# EAGLE board SYSTEM MINIMUM ATMEGA16 L298 LCD FIX (EAGLE 5.04)
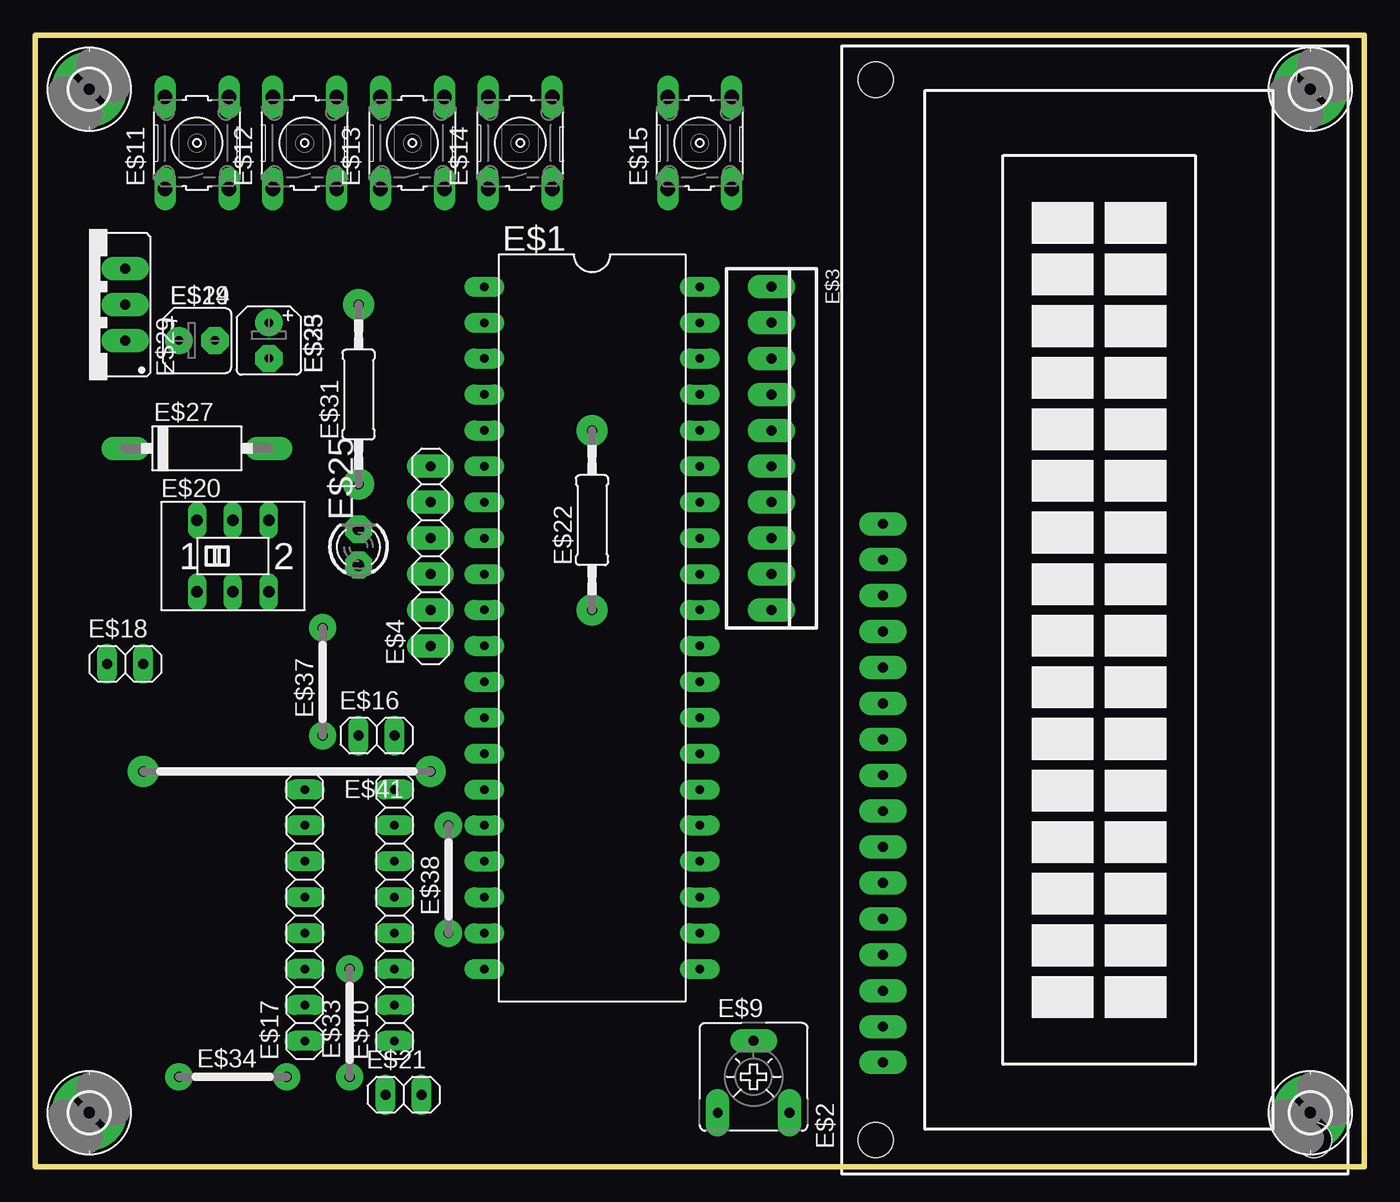
[diagram p0: board, top side]
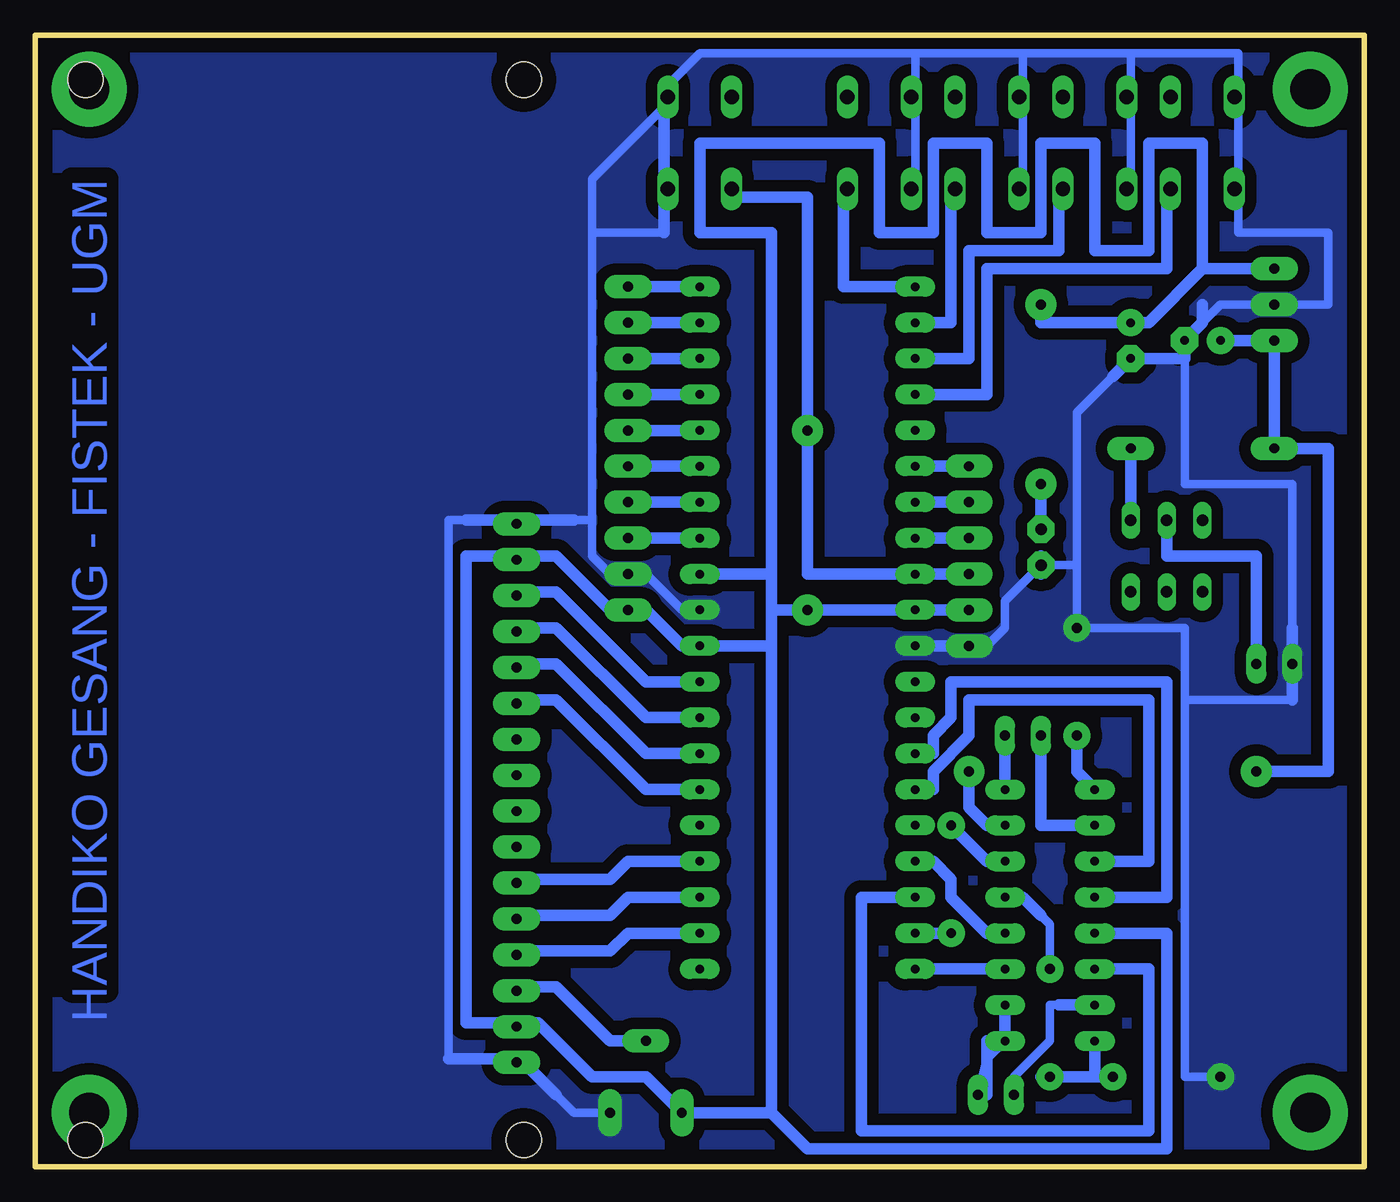
[diagram p1: board, bottom side, seen from below]

Size 93.98 x 80.01 mm. Coordinates in mm from the lower left corner, seen from the top.
Outline: 0,0 93.98,0 93.98,80.01 0,80.01 0,0
Copper layers (1*16): Top 0.035mm / dielectric 1.5mm / Bottom 0.035mm
Design rules "default": minimum track width 10mil, minimum drill 24mil, track to track 8mil, track to pad 8mil, pad to pad 8mil, via to via 8mil, smd to smd 8mil, copper to edge 40mil, drill to drill 8mil, minimum pad ring 10mil, minimum via ring 8mil, stop-mask expansion 4mil, vias tented up to drill 0mil, thermal gap 10mil

## Footprints (pad centres in the part's own frame; a part is rotated, then mirrored left to right if it is on the bottom)
DIL40 = drill 0.6 pad 1.422 long: 1 -24.13,-7.62; 2 -21.59,-7.62; 3 -19.05,-7.62; 4 -16.51,-7.62; 5 -13.97,-7.62; 6 -11.43,-7.62; 7 -8.89,-7.62; 8 -6.35,-7.62; 9 -3.81,-7.62; 10 -1.27,-7.62; 11 1.27,-7.62; 12 3.81,-7.62; 13 6.35,-7.62; 14 8.89,-7.62; 15 11.43,-7.62; 16 13.97,-7.62; 17 16.51,-7.62; 18 19.05,-7.62; 19 21.59,-7.62; 20 24.13,-7.62; 21 24.13,7.62; 22 21.59,7.62; 23 19.05,7.62; 24 16.51,7.62; 25 13.97,7.62; 26 11.43,7.62; 27 8.89,7.62; 28 6.35,7.62; 29 3.81,7.62; 30 1.27,7.62; 31 -1.27,7.62; 32 -3.81,7.62; 33 -6.35,7.62; 34 -8.89,7.62; 35 -11.43,7.62; 36 -13.97,7.62; 37 -16.51,7.62; 38 -19.05,7.62; 39 -21.59,7.62; 40 -24.13,7.62
TUXGR_16X2_R2 = drill 0.7 pad 1.676 long: 1 -32.01,14.99; 2 -29.47,14.99; 3 -26.93,14.99; 4 -24.39,14.99; 5 -21.85,14.99; 6 -19.31,14.99; 7 -16.77,14.99; 8 -14.23,14.99; 9 -11.69,14.99; 10 -9.15,14.99; 11 -6.61,14.99; 12 -4.07,14.99; 13 -1.53,14.99; 14 1.01,14.99; 15 3.55,14.99; 16 6.09,14.99 | hole 2.5: -37.5,-15.5; 37.5,-15.5; -37.5,15.5; 37.5,15.5
22-23-2101 = drill 0.7 pad 1.676 long: 1 -11.43,0; 2 -8.89,0; 3 -6.35,0; 4 -3.81,0; 5 -1.27,0; 6 1.27,0; 7 3.81,0; 8 6.35,0; 9 8.89,0; 10 11.43,0
1X06 = drill 0.7 pad 1.676 long: 1 -6.35,0; 2 -3.81,0; 3 -1.27,0; 4 1.27,0; 5 3.81,0; 6 6.35,0
2,8-PAD = drill 2.8 pad 5.334 round: B2,8 0,0
CA6V = drill 0.7 pad 1.676 long: A -2.54,-2.54; E 2.54,-2.54; S 0,2.54
1X08 = drill 0.6 pad 1.422 long: 1 -8.89,0; 2 -6.35,0; 3 -3.81,0; 4 -1.27,0; 5 1.27,0; 6 3.81,0; 7 6.35,0; 8 8.89,0
B3F-10XX = drill 1.016 long: 1 -3.251,2.261; 2 3.251,2.261; 3 -3.251,-2.261; 4 3.251,-2.261
1X02 = drill 0.7 pad 1.422 long: 1 -1.27,0; 2 1.27,0
B45181A = drill 0.6 pad 1.93 round: + -1.27,0 | drill 0.6 pad 1.93 octagon: - 1.27,0
A68-A31 = drill 0.813 long: 1 -2.54,-2.54; 2 0,-2.54; 3 2.54,-2.54; 4 -2.54,2.54; 5 0,2.54; 6 2.54,2.54
0207/12 = drill 0.7 pad 2.184 round: 1 -6.35,0; 2 6.35,0
LED3MM = drill 0.813 pad 1.93 octagon: A 1.27,0; K -1.27,0
P1-10 = drill 0.7 pad 1.676 long: A 5.08,0; C -5.08,0
78XXS = drill 0.7 pad 1.676 long: GND 0,-2.54; IN -2.54,-2.54; OUT 2.54,-2.54
07 = drill 0.7 pad 1.93 round: 1 -3.81,0; 2 3.81,0
20 = drill 0.7 pad 2.184 round: 1 -10.16,0; 2 10.16,0

## Placement (x,y rotation side)
E$1  [DIL40]  39.37,38.1 270 top
E$2  [TUXGR_16X2_R2]  74.93,39.37 90 top
E$3  [22-23-2101]  52.07,50.8 270 top
E$4  [1X06]  27.94,43.18 90 top
E$5  [2,8-PAD]  3.81,3.81 0 top
E$6  [2,8-PAD]  90.17,3.81 0 top
E$7  [2,8-PAD]  90.17,76.2 0 top
E$8  [2,8-PAD]  3.81,76.2 0 top
E$9  [CA6V]  50.8,6.35 0 top
E$10  [1X08]  25.4,17.78 90 top
E$11  [B3F-10XX]  11.43,72.39 90 top
E$12  [B3F-10XX]  19.05,72.39 90 top
E$13  [B3F-10XX]  26.67,72.39 90 top
E$14  [B3F-10XX]  34.29,72.39 90 top
E$15  [B3F-10XX]  46.99,72.39 90 top
E$16  [1X02]  24.13,30.48 0 top
E$17  [1X08]  19.05,17.78 90 top
E$18  [1X02]  6.35,35.56 0 top
E$19  [B45181A]  11.43,58.42 0 top
E$20  [A68-A31]  13.97,43.18 0 top
E$21  [1X02]  26.03,5.08 0 top
E$22  [0207/12]  39.37,45.72 90 top
E$23  [B45181A]  16.51,58.42 270 top
E$24  [B45181A]  11.43,58.42 0 top
E$25  [LED3MM]  22.86,43.81 90 top
E$27  [P1-10]  11.43,50.8 0 top
E$29  [78XXS]  3.81,60.96 90 top
E$31  [0207/12]  22.86,54.61 90 top
E$33  [07]  22.22,10.16 90 top
E$34  [07]  13.97,6.35 0 top
E$35  [B45181A]  16.51,58.42 270 top
E$37  [07]  20.32,34.29 90 top
E$38  [07]  29.21,20.32 90 top
E$41  [20]  17.78,27.94 180 top

## Library data of the parts
E$1 = atmel
E$2 = display-lcd
E$3 = con-molex
E$4 E$10 E$16-E$18 E$21 = pinhead
E$5-E$8 = holes
E$9 = pot
E$11-E$15 = switch-omron
E$19 E$22-E$24 E$31 E$35 = resistor
E$20 = switch
E$25 = led
E$27 = diode
E$29 = v-reg
E$33 E$34 E$37 E$38 E$41 = jumper

## Nets
GND: E$1.11 E$1.31 E$3.9 E$4.1 E$9.E E$18.1 E$23.- E$24.- E$29.GND E$34.1 E$37.2
S$1: E$1.40 E$3.1
S$2: E$1.39 E$3.2
S$3: E$1.38
S$4: E$1.37 E$3.4
S$5: E$1.36 E$3.5
S$6: E$1.35 E$3.6
S$7: E$1.34 E$3.7
S$8: E$1.33 E$3.8
S$9: E$1.10 E$1.30 E$1.32 E$3.10 E$4.2 E$9.A E$22.1 E$23.+ E$29.OUT E$31.2
S$10: E$1.4
S$12: E$1.6 E$4.6
S$13: E$1.7 E$4.5
S$14: E$1.8 E$4.4
S$15: E$1.9 E$4.3 E$22.2
S$16: E$1.3
S$17: E$20.6 E$27.A
S$19: E$1.2
S$20: E$25.A E$31.1
S$21: E$9.S
S$22: E$1.1
S$26: E$1.22
S$28: E$1.23
S$29: E$24.+ E$27.C E$29.IN E$41.2
S$31: E$18.2 E$20.5
S$32: E$1.24
S$33: E$16.2
S$34: E$16.1
S$35: E$21.2
S$36: E$21.1
S$37: E$1.20
S$38: E$1.17
S$39: E$37.1
S$40: E$1.14
S$41: E$1.15
S$42: E$1.18
S$43: E$1.26
S$44: E$41.1
S$45: E$38.2
S$46: E$1.19 E$38.1
S$47: E$33.2
S$48: E$33.1 E$34.2
S$49: E$1.27
S$50: E$1.28
S$51: E$1.29

## Tracks (layer width: path | path; a pad name or v marks a point on that pad's centre or on a via)
GND
  Bottom 0.61: E$9.E 55.88,3.81 57.15,5.08 | E$1.31 48.26,39.37 50.8,41.91 E$3.9 53.34,41.91 54.61,43.18 54.61,45.72 | 64.77,7.62 64.77,45.72 63.5,45.72 | 54.61,45.72 55.88,45.72 | 54.61,66.04 54.61,69.85 49.53,74.93 | 54.61,66.04 54.61,45.72 | 49.53,71.12 49.53,68.58 | 49.53,71.12 49.53,66.04 54.61,66.04 | 49.53,74.93 49.53,71.12 | 49.53,74.93 49.53,76.2 46.99,78.74 31.75,78.74 | 31.75,78.74 31.75,68.58 | 24.13,76.2 24.13,74.93 | 24.13,76.2 24.13,68.58 | 24.13,78.74 24.13,76.2 | 24.13,78.74 31.75,78.74 | 16.51,76.2 16.51,73.66 | 16.51,76.2 16.51,68.58 | 16.51,78.74 16.51,76.2 | 16.51,78.74 24.13,78.74 | 16.51,78.74 8.89,78.74 8.89,66.04 2.54,66.04 2.54,60.96 E$29.GND | E$29.GND 5.08,60.96 | E$1.11 E$4.1 26.67,36.83 25.4,38.1 25.4,40.01 22.86,42.55 20.32,42.55 | E$29.GND 10.16,60.96 E$24.- | 12.7,57.15 12.7,48.26 5.08,48.26 5.08,38.1 | 17.78,55.88 20.32,53.34 20.32,42.55 | 20.32,42.55 E$37.2 12.7,38.1 12.7,33.02 | 12.7,33.02 5.08,33.02 | 12.7,33.02 12.7,6.35 E$34.1
  Bottom 0.813: 57.15,5.08 59.69,7.62 64.77,7.62 | 55.88,45.72 63.5,45.72 | 49.53,76.2 49.53,66.04 | 11.43,60.96 11.43,59.69 E$24.- 12.7,57.15 E$23.- 17.78,55.88 | 5.08,38.1 E$18.1 5.08,33.02 | E$4.1 E$1.11 E$4.1
  pour Bottom (isolate 0.813, no thermals): 0,80.01 93.98,80.01 93.98,0 0,0
S$1
  Bottom 0.61: E$1.40 E$3.1
  Bottom 0.813: E$1.40 E$3.1
S$2
  Bottom 0.61: E$1.39 E$3.2
  Bottom 0.813: E$1.39 E$3.2
S$3
  Bottom 0.61: E$1.38 52.07,57.15
  Bottom 0.813: E$1.38 53.34,57.15
S$4
  Bottom 0.61: E$1.37 E$3.4
  Bottom 0.813: E$1.37 E$3.4
S$5
  Bottom 0.61: E$1.36 E$3.5
  Bottom 0.813: E$1.36 E$3.5 E$1.36
S$6
  Bottom 0.61: E$1.35 E$3.6
  Bottom 0.813: E$1.35 E$3.6
S$7
  Bottom 0.61: E$1.34 E$3.7
  Bottom 0.813: E$1.34 E$3.7
S$8
  Bottom 0.61: E$1.33 E$3.8
  Bottom 0.813: E$1.33 E$3.8
S$9
  Bottom 0.61: E$1.10 E$4.2 E$1.10
  Bottom 0.813: 50.8,39.37 E$3.10 53.34,39.37 | 41.91,3.81 E$9.A 50.8,6.35 54.61,6.35 58.42,10.16 63.5,10.16 63.5,43.18 57.15,43.18 53.34,39.37 | 41.91,3.81 39.37,1.27 13.97,1.27 13.97,16.51 19.05,16.51 | 50.8,39.37 48.26,36.83 E$1.30 41.91,36.83 | 50.8,39.37 53.34,39.37 | 41.91,3.81 41.91,36.83 | 33.02,39.37 E$1.10 E$4.2 33.02,39.37 | 33.02,39.37 E$22.1 41.91,39.37 | 41.91,36.83 41.91,39.37 | 41.91,39.37 41.91,41.91 | 41.91,41.91 E$1.32 | 41.91,41.91 41.91,66.04 46.99,66.04 46.99,72.39 34.29,72.39 34.29,66.04 30.48,66.04 30.48,72.39 26.67,72.39 26.67,66.04 22.86,66.04 22.86,72.39 19.05,72.39 19.05,64.77 15.24,64.77 15.24,72.39 11.43,72.39 11.43,63.5 | 11.43,63.5 E$29.OUT | 11.43,63.5 15.24,59.69 E$23.+ 22.86,59.69 E$31.2
S$10
  Bottom 0.813: E$1.4 26.67,54.61 26.67,63.5 13.97,63.5 13.97,69.85
S$12
  Bottom 0.61: E$4.6 E$1.6
  Bottom 0.813: E$4.6 E$1.6
S$13
  Bottom 0.61: E$4.5 E$1.7
  Bottom 0.813: E$4.5 E$1.7
S$14
  Bottom 0.61: E$4.4 E$1.8
  Bottom 0.813: E$4.4 E$1.8
S$15
  Bottom 0.61: E$4.3 E$1.9
  Bottom 0.813: E$4.3 E$1.9 39.37,41.91 E$22.2 39.37,68.58 44.45,68.58
S$16
  Bottom 0.61: 21.59,68.58 21.59,69.85
  Bottom 0.813: 21.59,68.58 21.59,64.77 27.94,64.77 27.94,57.15 E$1.3
S$17
  Bottom 0.813: E$20.6 E$27.A
S$19
  Bottom 0.61: 29.21,68.58 29.21,69.85
  Bottom 0.813: E$1.2 29.21,59.69 29.21,68.58
S$20
  Bottom 0.61: E$25.A 22.86,45.72
  Bottom 0.813: 22.86,45.72 E$31.1
S$21
  Bottom 0.813: E$9.S 53.34,8.89 57.15,12.7 59.69,12.7
S$22
  Bottom 0.813: E$1.1 36.83,62.23 36.83,69.85
S$23
  Bottom 0.813: 22.86,41.91 22.86,43.18
S$26
  Bottom 0.61: 53.34,15.24 59.69,15.24
  Bottom 0.813: 60.96,15.24 53.34,15.24 52.07,16.51 E$1.22
S$28
  Bottom 0.813: E$1.23 52.07,19.05 53.34,17.78 59.69,17.78
S$29
  Bottom 0.61: E$24.+ E$29.IN E$27.C
  Bottom 0.813: E$24.+ E$29.IN E$27.C 2.54,50.8 2.54,27.94 E$41.2
S$31
  Bottom 0.813: E$20.5 13.97,43.18 7.62,43.18 E$18.2
S$32
  Bottom 0.813: 59.69,20.32 53.34,20.32 52.07,21.59 E$1.24
S$33
  Bottom 0.813: 25.4,26.67 E$16.2
S$34
  Bottom 0.813: E$16.1 22.86,24.13 19.05,24.13
S$35
  Bottom 0.61: 25.4,8.89 26.67,7.62 E$21.2
  Bottom 0.813: 25.4,11.43 25.4,8.89 26.67,8.89 26.67,5.08
S$36
  Bottom 0.61: 21.59,11.43 22.22,11.43 22.22,8.89 24.77,6.35 E$21.1
  Bottom 0.813: 21.59,11.43 19.05,11.43
S$37
  Bottom 0.813: 25.4,13.97 E$1.20
S$38
  Bottom 0.813: E$1.17 30.48,21.59 29.21,20.32 29.21,19.05 26.67,16.51 25.4,16.51
S$39
  Bottom 0.813: E$37.1 20.32,27.94 19.05,26.67
S$40
  Bottom 0.813: 19.05,19.05 13.97,19.05 13.97,34.29 29.21,34.29 29.21,31.75 30.48,30.48 30.48,29.21 E$1.14
S$41
  Bottom 0.813: E$1.15 30.48,26.67 30.48,27.94 27.94,30.48 27.94,33.02 15.24,33.02 15.24,21.59 19.05,21.59
S$42
  Bottom 0.813: 19.05,13.97 15.24,13.97 15.24,2.54 35.56,2.54 35.56,19.05 E$1.18
S$43
  Bottom 0.813: E$1.26 50.8,26.67 57.15,33.02 59.69,33.02
S$44
  Bottom 0.813: E$41.1 27.94,25.4 26.67,24.13 25.4,24.13
S$45
  Bottom 0.813: E$38.2 26.67,21.59 25.4,21.59
S$46
  Bottom 0.61: E$38.1 E$1.19
  Bottom 0.813: E$38.1 E$1.19
S$47
  Bottom 0.61: 22.86,17.78 22.22,17.14 E$33.2
  Bottom 0.813: 25.4,19.05 24.13,19.05 22.86,17.78
S$48
  Bottom 0.61: 19.05,6.35 E$33.1
  Bottom 0.813: 19.05,6.35 22.86,6.35 | E$34.2 19.05,6.35 | 19.05,6.35 19.05,8.89
S$49
  Bottom 0.813: 59.69,35.56 57.15,35.56 50.8,29.21 E$1.27
S$50
  Bottom 0.813: E$1.28 50.8,31.75 57.15,38.1 59.69,38.1
S$51
  Bottom 0.813: 59.69,40.64 57.15,40.64 50.8,34.29 E$1.29

## Text on the board
Bottom: HANDIKO GESANG - FISTEK - UGM